# Altium PCB ver1.PcbDoc (part 1 of 2)
Units mil, origin at the board's own origin, x right, y up, seen from the top; angles counter-clockwise.
Board outline 3990 x 2445 mil, 4 copper layers (Top Layer, Top Inner, Bottom Inner, Bottom Layer), stack 53.912 mil thick; 100 components, 79 nets, 453 pads, 152 vias.
Unrouted connection lines stored in the file: 12.
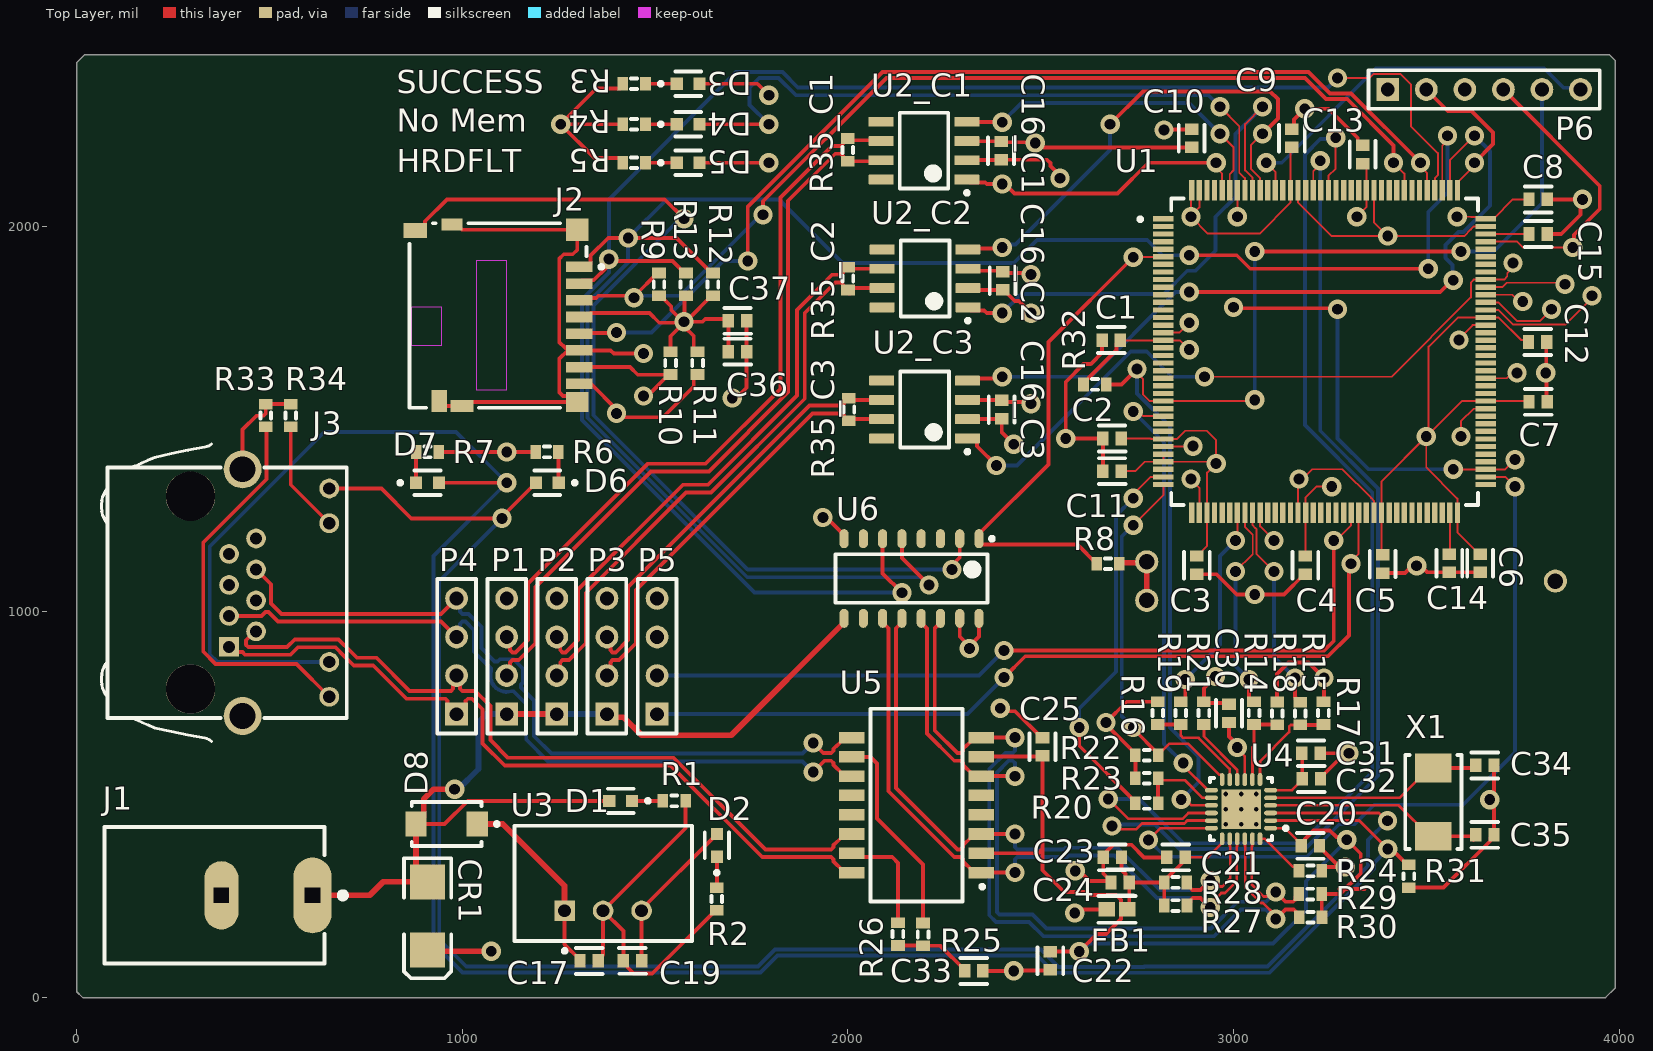
[diagram p0: Top Layer view]
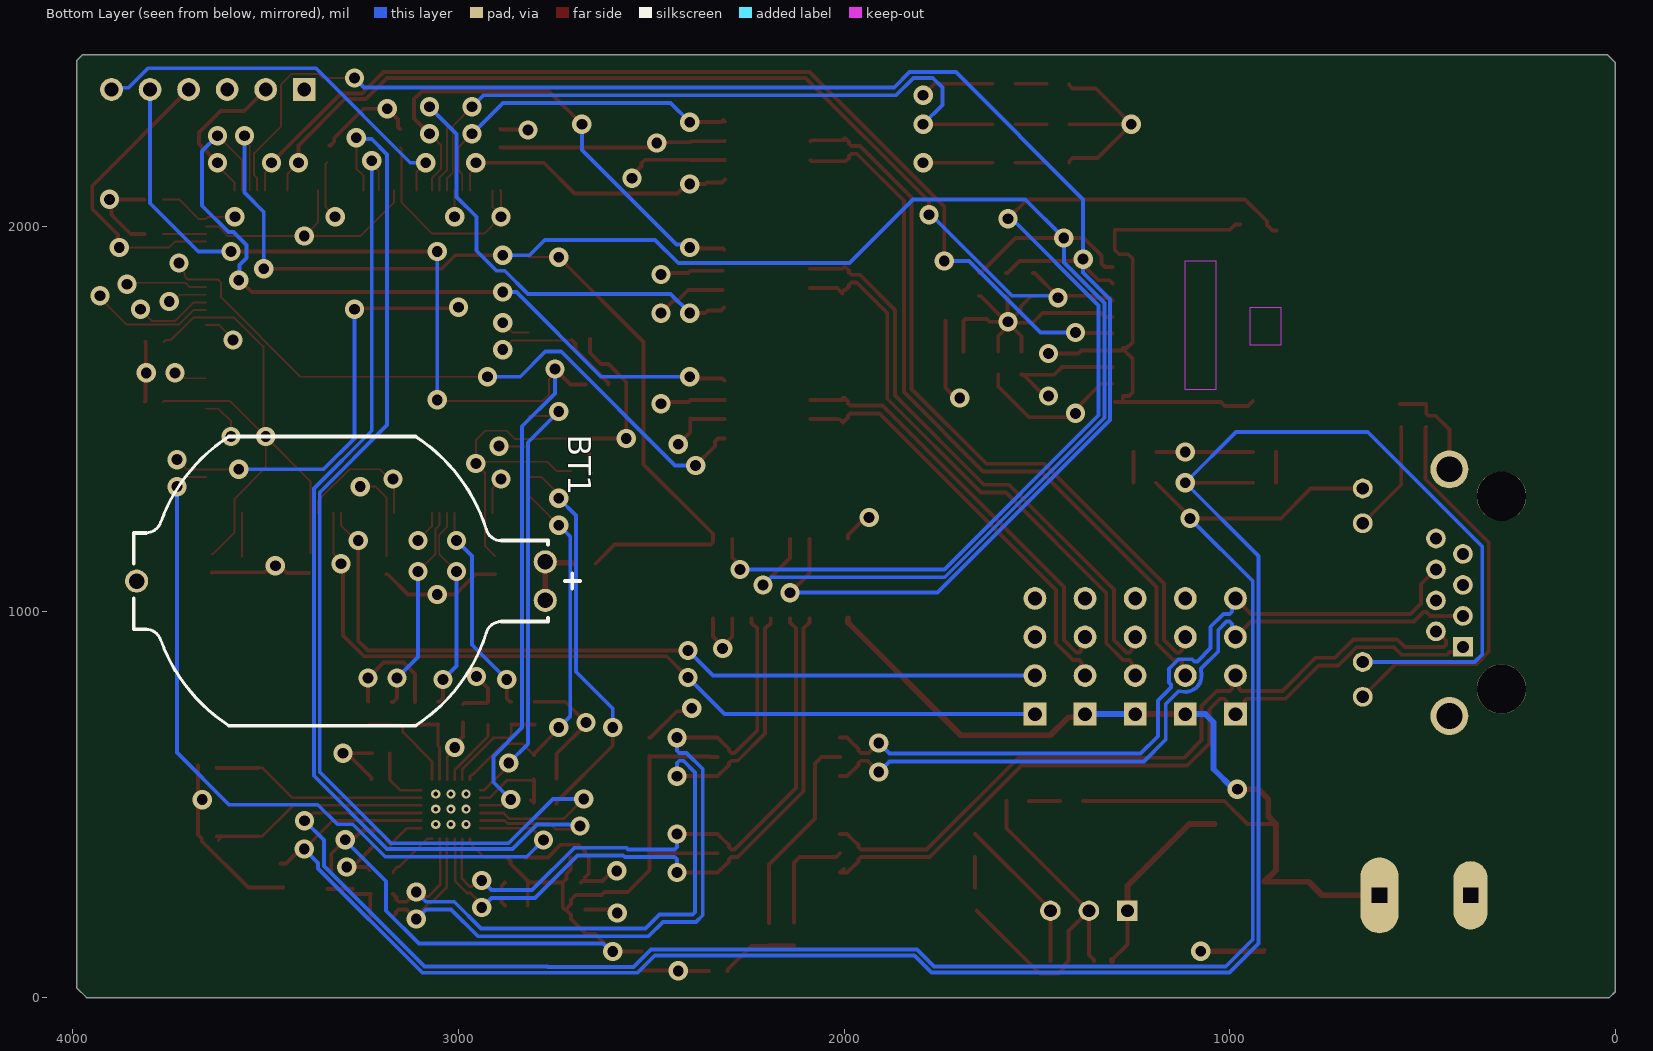
[diagram p1: Bottom Layer view, seen from below]
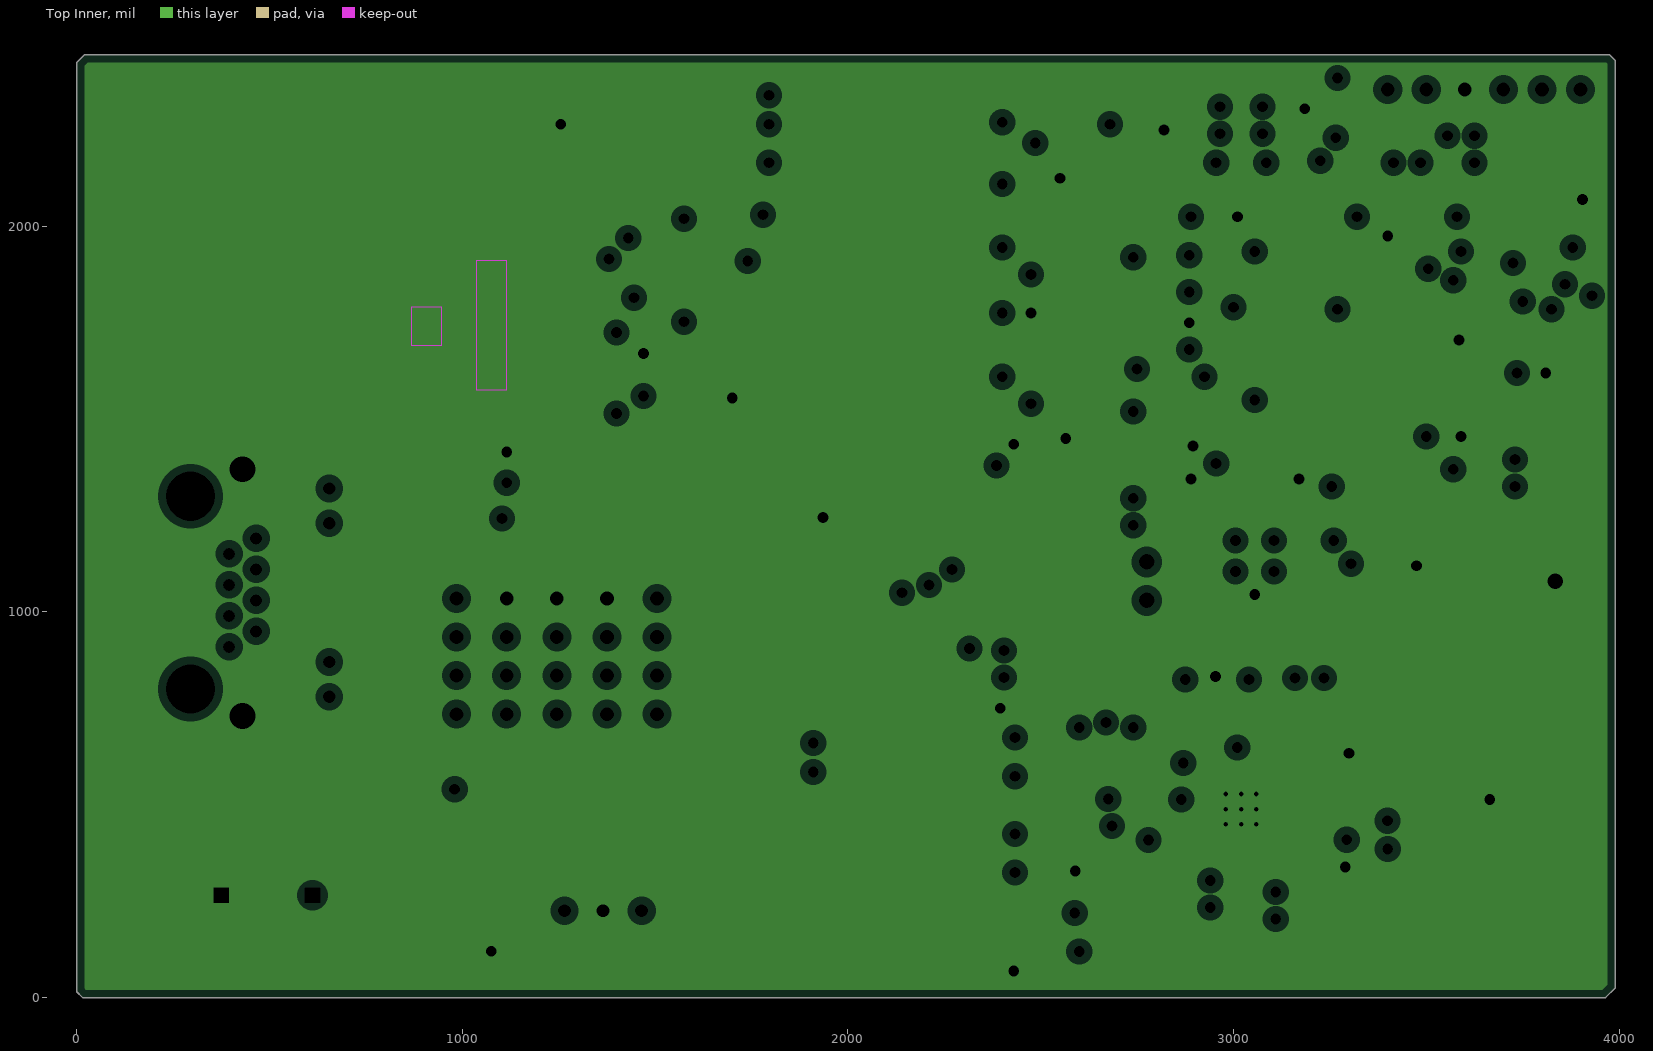
[diagram p2: Top Inner, clearances drawn from the general rule]
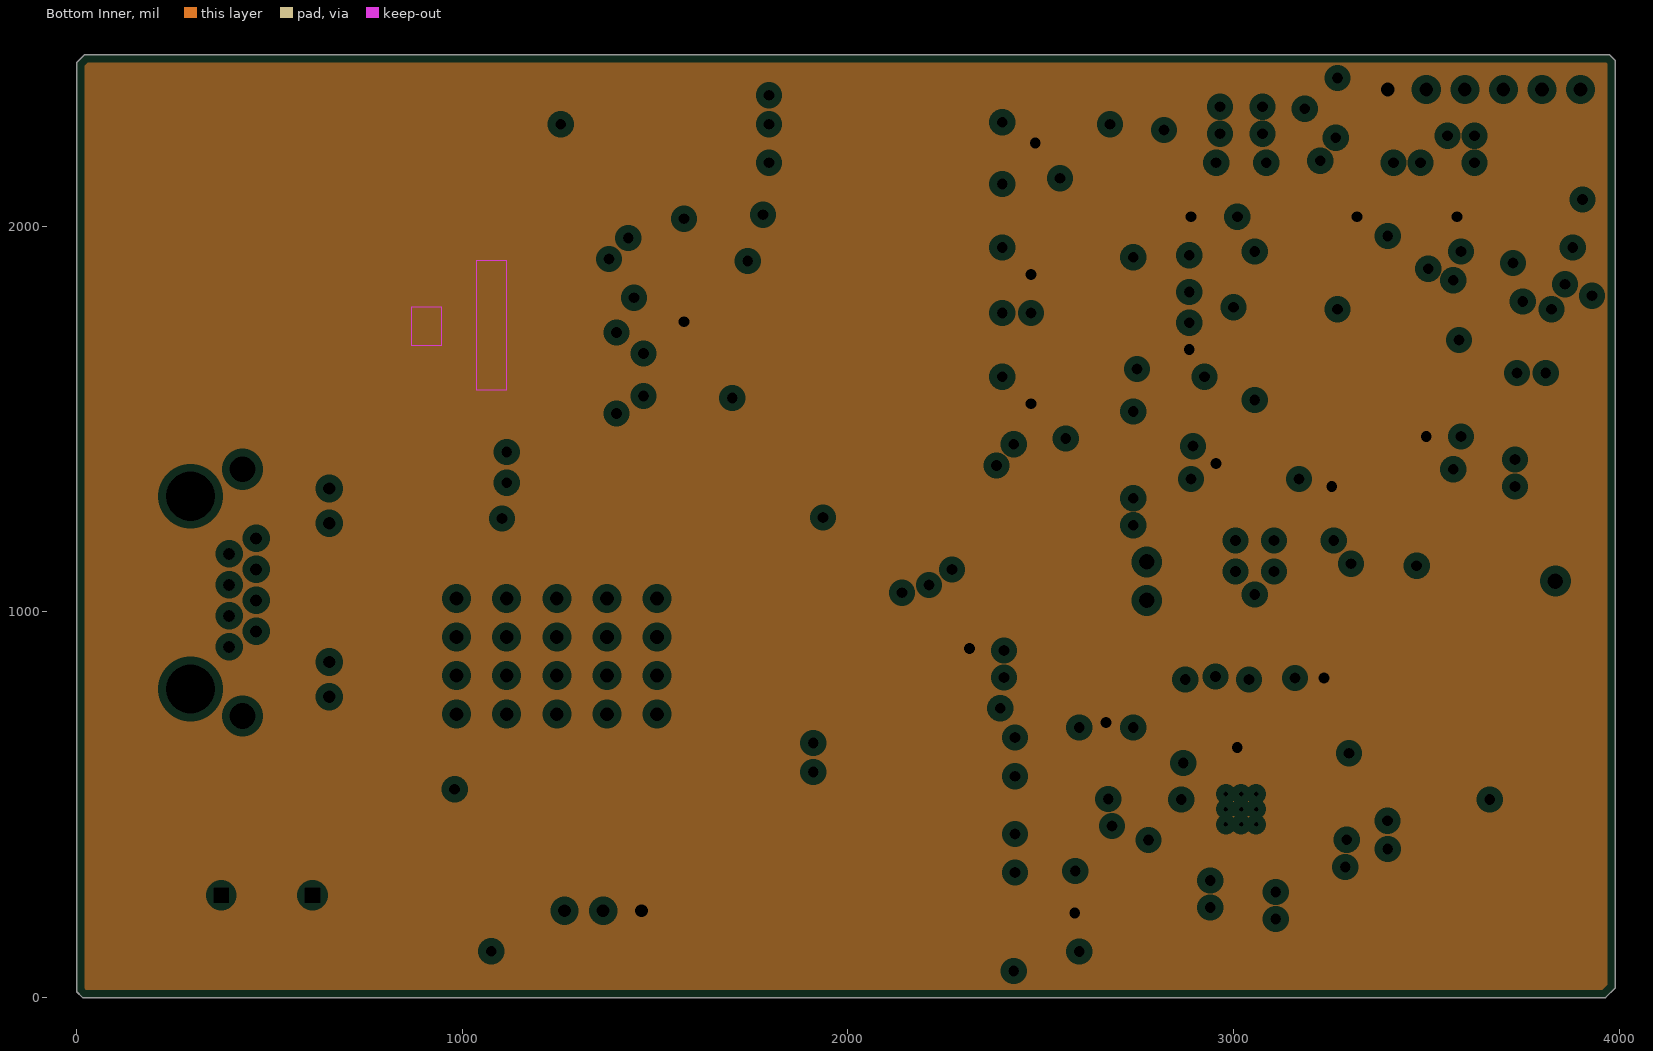
[diagram p3: Bottom Inner, clearances drawn from the general rule]
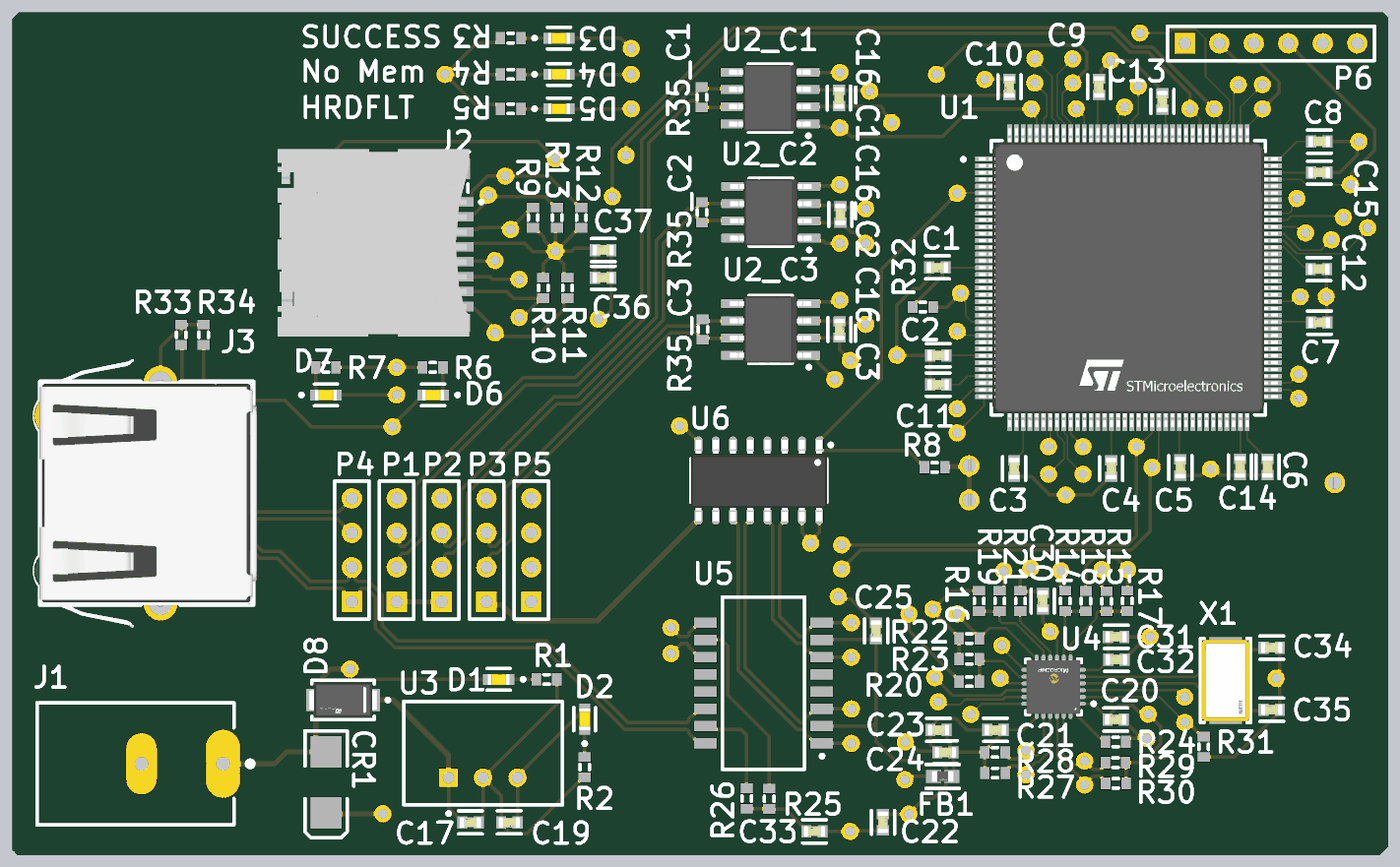
[diagram p5: 3D render of the assembled board from above, using the file's embedded part models]

## Layer stack, top to bottom
Top Solder: solder mask 1, SM-001, Dk 4
Top Layer: signal copper 1.378
Dielectric 1: prepreg 5.1, PP-017, Dk 4.3
Dielectric 2: prepreg 5.1, PP-017, Dk 4.3
Top Inner: plane copper 1.378, net GND
Dielectric 3: core 28, Core-039, Dk 4.8
Bottom Inner: plane copper 1.378, net 3.3V
Dielectric 4: prepreg 5.1, PP-017, Dk 4.3
Dielectric 5: prepreg 5.1, PP-017, Dk 4.3
Bottom Layer: signal copper 1.378
Bottom Solder: solder mask 1, SM-001, Dk 4

## Board outline
3975,2445 3990,2430 3990,25 3965,0 15,0 0,15 0,2425 20,2445

## Design rules (kind name [scope] priority, off if disabled: settings)
Clearance [All] p1: gap=10 ignorepadtopadclearanceinfootprint=FALSE except(0: SMDPad-Hole Via-Hole Fill-Hole Poly-Hole Region-Hole Text-Hole; 5: Arc-Arc Arc-Track Track-Track SMDPad-SMDPad; 7.87: Arc-THPad Track-THPad; 13: Arc-Hole Track-Hole; 19.68: THPad-THPad THPad-Hole Via-Via)
DiffPairsRouting [All] p1: maxlimit=100 minlimit=10 mostfreqgap=10 toplayer_minwidth=3.5 toplayer_maxwidth=100 toplayer_prefwidth=10 bottomlayer_minwidth=3.5 bottomlayer_maxwidth=100 bottomlayer_prefwidth=10 maxuncoupledlength=20
HoleSize [All] p1: absolutevalues=TRUE maxlimit=100 minlimit=7.88 maxpercent=80.000 minpercent=20.000
HoleToHoleClearance [All] p1: gap=20 allowstackedmicrovias=TRUE
PlaneClearance [All] p1: clearance=20
PlaneConnect [All] p1: planeconnectstyle=Relief reliefexpansion=20 reliefentries=4 reliefconductorwidth=10 reliefairgap=10
PolygonConnect [All] p1: connectstyle=Relief reliefconductorwidth=10 reliefentries=4 polygonreliefangle="90 Angle" airgapwidth=10
RoomDefinition U_MCU_POWER [InComponentClass('U_MCU_POWER')] p1: confinementstyle=ConfineIn formatcopy=TRUE lockcomponents=FALSE outline 825,-10 3890,-10 3890,1485 825,1485
RoomDefinition U_MCU [InComponentClass('U_MCU')] p2: confinementstyle=ConfineIn formatcopy=TRUE lockcomponents=FALSE outline 2530,990 3965,990 3965,2430 2530,2430
RoomDefinition U_CONNECTOR [InComponentClass('U_CONNECTOR')] p3: confinementstyle=ConfineIn formatcopy=TRUE lockcomponents=FALSE outline 35,30 1650,30 1650,1640 35,1640
RoomDefinition U_ETHERNET_INTERFACE [InComponentClass('U_ETHERNET_INTERFACE')] p4: confinementstyle=ConfineIn formatcopy=TRUE lockcomponents=FALSE outline 1944.84,-21.42 3899.84,-21.42 3899.84,883.58 1944.84,883.58
RoomDefinition C1 [InComponentClass('C1')] p5: confinementstyle=ConfineIn formatcopy=TRUE lockcomponents=FALSE outline 1892.28,1991.34 2522.28,1991.34 2522.28,2406.34 1892.28,2406.34
RoomDefinition C2 [InComponentClass('C2')] p6: confinementstyle=ConfineIn formatcopy=TRUE lockcomponents=FALSE outline 1876.34,1690 2518.78,1690 2518.78,2077.24 1876.34,2077.24
RoomDefinition C3 [InComponentClass('C3')] p7: confinementstyle=ConfineIn formatcopy=TRUE lockcomponents=FALSE outline 1890,1380 2520,1380 2520,1760 1890,1760
RoomDefinition U_LEDS [InComponentClass('U_LEDS')] p8: confinementstyle=ConfineOut formatcopy=TRUE lockcomponents=FALSE outline 30,2470 970,2470 970,3010.94 30,3010.94
RoomDefinition U_SD_INTERFACE [InComponentClass('U_SD_INTERFACE')] p9: confinementstyle=ConfineIn formatcopy=TRUE lockcomponents=FALSE outline 820,1459.53 1900,1459.53 1900,2104.53 820,2104.53
RoomDefinition U_ESD_PROTECTION [InComponentClass('U_ESD_PROTECTION')] p10: confinementstyle=ConfineIn formatcopy=TRUE lockcomponents=FALSE outline 1895,1226.65 1895,946.65 2430,946.65 2430,1226.65
RoutingVias [All] p1: holewidth=28 width=50 viastyle="Through Hole" minholewidth=28 minwidth=50 maxholewidth=28 maxwidth=50
SolderMaskExpansion [All] p1: expansion=2 istentingtop=FALSE
Width [All] p1: maxlimit=1000 minlimit=3.5 preferedwidth=10 minimp=50.000000 maximp=50.000000 favimp=50.000000
25 further rules are at their usual default settings.

## Classes and differential pairs
component class C1: C16 C16_C1 R35_C1 U2_C1
channel class CAN_TRANSCEIVER: C2 C3 U_CAN_TRANSCEIVER1
net class SD_D[3..0]: SD_D0 SD_D1 SD_D2 SD_D3
component class U_SD_INTERFACE: C36 C37 J2 R9 R10 R11 R12 R13
component class U_MCU: C1 C2 C3 C4 C5 C6 C7 C8 C9 C10 C11 C12 C13 C14 C15 P6 R32 U1
component class U_MCU_POWER: BT1 C17 C19 CR1 D8 R8 U3
component class U_LEDS: D1 D2 D3 D4 D5 D6 D7 R1 R2 R3 R4 R5 R6 R7
component class U_ETHERNET_INTERFACE: C20 C21 C22 C23 C24 C25 C30 C31 C32 C33 C34 C35 FB1 R14 R15 R16 R17 R18 R19 R20 R21 R22 R23 R24 R25 R26 R27 R28 R29 R30 R31 U4 U5 X1
component class U_ESD_PROTECTION: U6
component class U_CONNECTOR: J1 J3 P1 P2 P3 P4 P5 R33 R34
component class C3: C16_C3 R35_C3 U2_C3
component class C2: C16_C2 R35_C2 U2_C2
differential pair C2: +C2_P -C2_N
differential pair C1: +C1_P -C1_N
differential pair C3: +C3_P -C3_N
differential pair TX: +TX_P -TX_N
differential pair TX_PHYS: +TX_PHYS_P -TX_PHYS_N
differential pair RX: +RX_P -RX_N
differential pair RX_PHYS: +RX_PHYS_P -RX_PHYS_N

## Components (designator, comment, footprint, x,y, rotation, side; value= is the part's Value field where it differs from the comment)
BT1 "120591-1" TECO-120591-1-2_V 3304.92,1080 r0 bottom locked
C1 "100nF" FP-C0603C-CF-MFG 2682.76,1705 r180 top value="0.10 μF"
C2 "100nF" FP-C0603C-CF-MFG 2685,1450 r180 top value="0.10 μF"
C3 "100nF" FP-C0603C-CF-MFG 2905,1121.38 r270 top value="0.10 μF"
C4 "100nF" FP-C0603C-CF-MFG 3186.38,1121.38 r270 top value="0.10 μF"
C5 "100nF" FP-C0603C-CF-MFG 3387.01,1124.37 r270 top value="0.10 μF"
C6 "100nF" FP-C0603C-CF-MFG 3640,1126.38 r270 top value="0.10 μF"
C7 "100nF" FP-C0603C-CF-MFG 3790,1545 r0 top value="0.10 μF"
C8 "100nF" FP-C0603C-CF-MFG 3790,2070 r0 top value="0.10 μF"
C9 "100nF" FP-C0603C-CF-MFG 3151.38,2228.62 r90 top value="0.10 μF"
C10 "100nF" FP-C0603C-CF-MFG 2891.38,2228.62 r90 top value="0.10 μF"
C11 "100nF" FP-C0603C-CF-MFG 2685,1365 r180 top value="0.10 μF"
C12 "100nF" FP-C0603C-CF-MFG 3788.62,1700 r0 top value="0.10 μF"
C13 "4.7uF" FP-C0603C-CF-MFG 3335,2186.38 r90 top value="0.10 μF"
C14 "2.2uF" FP-C0603C-CF-MFG 3560,1126.38 r270 top value="0.10 μF"
C15 "2.2uF" FP-C0603C-CF-MFG 3790,1980 r0 top value="0.10 μF"
C16_C1 "100nF" FP-C0603C-CF-MFG 2397.28,2196.34 r270 top value="0.10 μF" (schematic designator C16)
C16_C2 "100nF" FP-C0603C-CF-MFG 2401.28,1858.88 r270 top value="0.10 μF" (schematic designator C16)
C16_C3 "100nF" FP-C0603C-CF-MFG 2398.78,1525 r270 top value="0.10 μF" (schematic designator C16)
C17 "2.2uF, 20V" FP-C0603C-CF-MFG 1328.62,95 r0 top value="0.10 μF"
C19 "4.7uF" FP-C0603C-CF-MFG 1441.38,95 r180 top value="0.10 μF"
C20 "100nF" FP-C0603C-CF-MFG 3199.53,393.42 r0 top value="0.10 μF"
C21 "100nF" FP-C0603C-CF-MFG 2850.91,363.42 r180 top value="0.10 μF"
C22 "100nF" FP-C0603C-CF-MFG 2524.84,95.43 r270 top value="0.10 μF"
C23 "10uF" FP-C0603C-CF-MFG 2685.91,363.42 r180 top value="0.10 μF"
C24 "100nF" FP-C0603C-CF-MFG 2705.91,298.42 r180 top value="0.10 μF"
C25 "100nF" FP-C0603C-CF-MFG 2504.84,650.43 r90 top value="0.10 μF"
C30 "100nF" FP-C0603C-CF-MFG 2988.27,736.97 r90 top value="0.10 μF"
C31 "470pF" FP-C0603C-CF-MFG 3200.91,633.42 r0 top value="0.10 μF"
C32 "1uF" FP-C0603C-CF-MFG 3201.89,566.97 r0 top value="0.10 μF"
C33 "1nF, 2kV" FP-C0603C-CF-MFG 2326.22,69.06 r0 top value="0.10 μF"
C34 "36pF" FP-C0603C-CF-MFG 3651.89,601.97 r0 top value="0.10 μF"
C35 "36pF" FP-C0603C-CF-MFG 3651.89,421.97 r0 top value="0.10 μF"
C36 "100nF" FP-C0603C-CF-MFG 1713.62,1675 r0 top value="0.10 μF"
C37 "10uF" FP-C0603C-CF-MFG 1713.62,1755 r0 top value="0.10 μF"
CR1 "SMBJ20CA" SMB 910,211.42 r270 top value=Value
D1 "ASMT-RF45-AN002" FP-ASMT-RF45-AN002-MFG 1410.47,510 r180 top
D2 "ASMT-RF45-AN002" FP-ASMT-RF45-AN002-MFG 1660,394.53 r90 top
D3 "ASMT-RF45-AN002" FP-ASMT-RF45-AN002-MFG 1585.47,2370 r0 top
D4 "ASMT-RA45-AP932" FP-ASMT-RF45-AN002-MFG 1585.47,2265 r0 top
D5 "ASMT-RH45-AQ502" FP-ASMT-RF45-AN002-MFG 1585.47,2165 r0 top
D6 "ASMT-RJ45-AQ502" FP-ASMT-RF45-AN002-MFG 1220.47,1335 r180 top
D7 "ASMT-RF45-AN002" FP-ASMT-RF45-AN002-MFG 909.53,1335 r0 top
D8 "STPS1H100A" FP-SMA-MFG 959.33,450 r180 top
FB1 "BLM18PG181SN1D" FP-BLM18-0_15-t0_8-IPC_B 2697.91,228.42 r0 top
J1 "PJ-037A" CUI_PJ-037A 611.22,265 r180 top
J2 "DM3D-SF" FP-DM3D-SF-MFG 1092.44,1768.82 r90 top
J3 "Modular Jack WR-MJ" 615008137421 390.08,1050 r270 top
P1 "CAN1" HDR1X4 1115,735 r90 top
P2 "CAN2" HDR1X4 1245,735 r90 top
P3 "CAN3" HDR1X4 1375,735 r90 top
P4 "Ethernet Output" HDR1X4 985,735 r90 top
P5 "UART and GPIO" HDR1X4 1505,735 r90 top
P6 "Nucleo Connector" HDR1X6 3400,2355 r0 top
R1 "Res3" J1-0603 1549.53,510 r180 top value=1K
R2 "Res3" J1-0603 1660,255.47 r90 top value=130
R3 "Res3" J1-0603 1445.47,2370 r0 top value=130
R4 "Res3" J1-0603 1445.47,2265 r0 top value=130
R5 "Res3" J1-0603 1445.47,2165 r0 top value=130
R6 "Res3" J1-0603 1219.53,1415 r0 top value=270
R7 "Res3" J1-0603 909.53,1415 r180 top value=270
R8 "Res3" J1-0603 2674.53,1125 r0 top value=10
R9 "Res3" J1-0603 1510,1849.53 r270 top value=47K
R10 "Res3" J1-0603 1540,1645.47 r90 top value=47K
R11 "Res3" J1-0603 1610,1645.47 r90 top value=47K
R12 "Res3" J1-0603 1650,1849.53 r270 top value=47K
R13 "Res3" J1-0603 1580,1849.53 r270 top value=47K
R14 "Res3" J1-0603 3053.27,737.44 r90 top value=33
R15 "Res3" J1-0603 3173.27,736.49 r90 top value=33
R16 "Res3" J1-0603 2803.27,737.44 r270 top value=10K
R17 "Res3" J1-0603 3233.27,737.44 r270 top value=10K
R18 "Res3" J1-0603 3113.27,736.97 r270 top value=10K
R19 "Res3" J1-0603 2863.27,737.44 r90 top value=33
R20 "Res3" J1-0603 2775,503.42 r0 top value=33
R21 "Res3" J1-0603 2923.27,737.44 r90 top value=10K
R22 "Res3" J1-0603 2775,628.42 r0 top value=1K5
R23 "Res3" J1-0603 2775,568.42 r0 top value=10K
R24 "Res3" J1-0603 3199.53,328.42 r0 top value=12K1
R25 "Res3" J1-0603 2194.84,163.58 r270 top value=75
R26 "Res3" J1-0603 2129.84,164.53 r270 top value=75
R27 "Res3" J1-0603 2850,238.42 r0 top value=50
R28 "Res3" J1-0603 2849.53,298.42 r0 top value=50
R29 "Res3" J1-0603 3199.06,268.42 r180 top value=50
R30 "Res3" J1-0603 3200,208.42 r180 top value=50
R31 "Res3" J1-0603 3454.84,314.53 r270 top value=10K
R32 "Res3" J1-0603 2640.47,1590 r0 top value=10K
R33 "Res3" J1-0603 490,1509.53 r270 top value=270
R34 "Res3" J1-0603 555,1509.53 r270 top value=270
R35_C1 "" J1-0603 1999.78,2198.37 r270 top value=120 (schematic designator R35)
R35_C2 "" J1-0603 2000,1864.53 r270 top value=120 (schematic designator R35)
R35_C3 "" J1-0603 2002.56,1525 r270 top value=120 (schematic designator R35)
U1 "STM32F767ZIT6" FP-LQFP144-1A-MFG 3236.38,1675 r0 top locked
U2_C1 "SN65HVD232QDG4" D0008A_M 2197.28,2196.34 r180 top (schematic designator U2)
U2_C2 "SN65HVD232QDG4" D0008A_M 2200,1865 r180 top (schematic designator U2)
U2_C3 "SN65HVD232QDG4" D0008A_M 2198.78,1525 r180 top (schematic designator U2)
U3 "TSR 1-2433" TRACO-SIP-3_V 1365,225 r0 top
U4 "LAN8742A-CZ-TR" FP-C04-143B-S4QFN-MFG 3019.53,488.42 r180 top
U5 "H1102NL" PULS-MODULE-16_V 2178.27,499.06 r180 top
U6 "SP720ABG" LFUS-SOIC-16_L 2165,1086.65 r270 top
X1 "ECS-250-18-23A-JGN-TR" FP-ECX-64A-MFG 3518.27,506.97 r270 top

## Footprints (in the part's own frame and the unit in brackets; to place one, negate y for a bottom-side part, rotate by r counter-clockwise, add the part's x,y. Pads: shape width x height; smd on the part's side, far side on the other; paste and mask are expansions set on the pad)
615008137421 [mm] "Modular Jack Horizontal Shielded with LED and EMI Panel Finger 8P8C Tab Up"
  rect 1.3x1.3 hole 0.8: 1(3.57,0.125)
  round 1.3 hole 0.8: 2(2.55,1.905) 3(1.53,0.125) 4(0.51,1.905) 5(-0.51,0.125) 6(-1.53,1.905) 7(-2.55,0.125) 8(-3.57,1.905) 9(-6.86,6.725) 10(-4.57,6.725) 11(4.57,6.725) 12(6.86,6.725)
  round 3.25 hole 3.25 unplated: MH1(-6.35,-2.415) MH2(6.35,-2.415)
  round 2.5 hole 1.7: S1(-8.125,1.015) S2(8.125,1.015)
  silkscreen extent -9.79,-8.29 9.79,7.87, body extent -9.88,-8.33 9.88,8.12, height 15.13
CUI_PJ-037A [mm]
  oval 2.5x5 hole 1 square: 1(0,0)
  oval 2.25x4.5 hole 1 square: 2(6,0)
  silkscreen extent -2.2,-4.5 13.7,4.5
D0008A_M [mm] "SOIC, 8-Leads, Body 5x4mm, Pitch 1.27mm, IPC Low Density"
  rrect15% 1.65x0.65 smd: 1(-2.825,1.905) 2(-2.825,0.635) 3(-2.825,-0.635) 4(-2.825,-1.905) 5(2.825,-1.905) 6(2.825,-0.635) 7(2.825,0.635) 8(2.825,1.905)
  silkscreen extent -2.95,-2.5 1.6,2.9, body extent -3,-2.45 3,2.45, height 1.63
FP-ASMT-RF45-AN002-MFG [mm]
  rect 0.8x0.8 smd paste+0 mask+0: 1(-0.75,0) 2(0.75,0)
  silkscreen extent -1.92,-0.8 0.85,0.8, body extent -1.25,-0.55 1.25,0.55, height 0.25
FP-BLM18-0_15-t0_8-IPC_B [mil]
  rect 43.55x37.73 smd paste+0 mask+0: 1(-26.62,0) 2(26.62,0)
  silkscreen extent -48,-35 48,35, body extent -58,-29 58,29, height 10
FP-C04-143B-S4QFN-MFG [mm]
  rrect100% 0.85x0.3 smd paste+0 mask+0: 1(-1.95,1.25) 2(-1.95,0.75) 3(-1.95,0.25) 4(-1.95,-0.25) 5(-1.95,-0.75) 6(-1.95,-1.25) 13(1.95,-1.25) 14(1.95,-0.75) 15(1.95,-0.25) 16(1.95,0.25) 17(1.95,0.75) 18(1.95,1.25)
  rrect100% 0.3x0.85 smd paste+0 mask+0: 7(-1.25,-1.95) 8(-0.75,-1.95) 9(-0.25,-1.95) 10(0.25,-1.95) 11(0.75,-1.95) 12(1.25,-1.95) 19(1.25,1.95) 20(0.75,1.95) 21(0.25,1.95) 22(-0.25,1.95) 23(-0.75,1.95) 24(-1.25,1.95)
  rect 2.6x2.6 smd paste+0 mask+0: 25(0,0)
  silkscreen extent -3.08,-2.05 2.05,2.05, body extent -2.47,-2.47 2.47,2.47, height 0.25
FP-C0603C-CF-MFG [mm]
  rect 0.75x0.9 smd paste+0 mask+0: 1(-0.6,0) 2(0.6,0)
  silkscreen extent -0.87,-0.85 0.88,0.85, body extent -1.2,-0.6 1.2,0.6, height 0.25
FP-DM3D-SF-MFG [mm]
  rect 0.7x1.75 smd paste+0 mask+0: 1(3.2,-5.35) 2(2.1,-5.35) 3(1,-5.35) 4(-0.1,-5.35) 5(-1.2,-5.35) 6(-2.3,-5.35) 7(-3.4,-5.35) 8(-4.5,-5.35)
  rect 1x1.55 smd paste+0 mask+0: 9(5.6,5.45)
  rect 1.45x1 smd paste+0 mask+0: 10(-5.625,3.875)
  rect 0.8x1.4 smd paste+0 mask+0: 11(6,3.025)
  rect 0.8x1.5 smd paste+0 mask+0: 12(-5.95,2.375)
  rect 1.3x1.5 smd paste+0 mask+0: 13(-5.7,-5.225)
  rect 1.5x1.5 smd paste+0 mask+0: 14(5.65,-5.225)
  Keep-Out Layer region: -1.95,3.72 0.55,3.72 0.55,5.72 -1.95,5.72
  Keep-Out Layer region: -4.9,-0.575 3.6,-0.575 3.6,1.425 -4.9,1.425
  silkscreen extent -6.07,-6.93 6.07,5.82, body extent -6.45,-6.32 6.5,6.32, height 0.25
FP-ECX-64A-MFG [mm]
  rect 1.9x2.4 smd paste+0 mask+0: 1(-2.25,0) 2(2.25,0)
  silkscreen extent -3.1,-1.85 3.1,1.85, body extent -3.3,-1.95 3.3,1.95, height 0.25
FP-LQFP144-1A-MFG [mm]
  rect 1.35x0.35 smd paste+0 mask+0: 1(-10.625,8.75) 2(-10.625,8.25) 3(-10.625,7.75) 4(-10.625,7.25) 5(-10.625,6.75) 6(-10.625,6.25) 7(-10.625,5.75) 8(-10.625,5.25) 9(-10.625,4.75) 10(-10.625,4.25) 11(-10.625,3.75) 12(-10.625,3.25) 13(-10.625,2.75) 14(-10.625,2.25) 15(-10.625,1.75) 16(-10.625,1.25) 17(-10.625,0.75) 18(-10.625,0.25) 19(-10.625,-0.25) 20(-10.625,-0.75) 21(-10.625,-1.25) 22(-10.625,-1.75) 23(-10.625,-2.25) 24(-10.625,-2.75) 25(-10.625,-3.25) 26(-10.625,-3.75) 27(-10.625,-4.25) 28(-10.625,-4.75) 29(-10.625,-5.25) 30(-10.625,-5.75) 31(-10.625,-6.25) 32(-10.625,-6.75) 33(-10.625,-7.25) 34(-10.625,-7.75) 35(-10.625,-8.25) 36(-10.625,-8.75) 73(10.625,-8.75) 74(10.625,-8.25) 75(10.625,-7.75) 76(10.625,-7.25) 77(10.625,-6.75) 78(10.625,-6.25) 79(10.625,-5.75) 80(10.625,-5.25) 81(10.625,-4.75) 82(10.625,-4.25) 83(10.625,-3.75) 84(10.625,-3.25) 85(10.625,-2.75) 86(10.625,-2.25) 87(10.625,-1.75) 88(10.625,-1.25) 89(10.625,-0.75) 90(10.625,-0.25) 91(10.625,0.25) 92(10.625,0.75) 93(10.625,1.25) 94(10.625,1.75) 95(10.625,2.25) 96(10.625,2.75) 97(10.625,3.25) 98(10.625,3.75) 99(10.625,4.25) 100(10.625,4.75) 101(10.625,5.25) 102(10.625,5.75) 103(10.625,6.25) 104(10.625,6.75) 105(10.625,7.25) 106(10.625,7.75) 107(10.625,8.25) 108(10.625,8.75)
  rect 0.35x1.35 smd paste+0 mask+0: 37(-8.75,-10.625) 38(-8.25,-10.625) 39(-7.75,-10.625) 40(-7.25,-10.625) 41(-6.75,-10.625) 42(-6.25,-10.625) 43(-5.75,-10.625) 44(-5.25,-10.625) 45(-4.75,-10.625) 46(-4.25,-10.625) 47(-3.75,-10.625) 48(-3.25,-10.625) 49(-2.75,-10.625) 50(-2.25,-10.625) 51(-1.75,-10.625) 52(-1.25,-10.625) 53(-0.75,-10.625) 54(-0.25,-10.625) 55(0.25,-10.625) 56(0.75,-10.625) 57(1.25,-10.625) 58(1.75,-10.625) 59(2.25,-10.625) 60(2.75,-10.625) 61(3.25,-10.625) 62(3.75,-10.625) 63(4.25,-10.625) 64(4.75,-10.625) 65(5.25,-10.625) 66(5.75,-10.625) 67(6.25,-10.625) 68(6.75,-10.625) 69(7.25,-10.625) 70(7.75,-10.625) 71(8.25,-10.625) 72(8.75,-10.625) 109(8.75,10.625) 110(8.25,10.625) 111(7.75,10.625) 112(7.25,10.625) 113(6.75,10.625) 114(6.25,10.625) 115(5.75,10.625) 116(5.25,10.625) 117(4.75,10.625) 118(4.25,10.625) 119(3.75,10.625) 120(3.25,10.625) 121(2.75,10.625) 122(2.25,10.625) 123(1.75,10.625) 124(1.25,10.625) 125(0.75,10.625) 126(0.25,10.625) 127(-0.25,10.625) 128(-0.75,10.625) 129(-1.25,10.625) 130(-1.75,10.625) 131(-2.25,10.625) 132(-2.75,10.625) 133(-3.25,10.625) 134(-3.75,10.625) 135(-4.25,10.625) 136(-4.75,10.625) 137(-5.25,10.625) 138(-5.75,10.625) 139(-6.25,10.625) 140(-6.75,10.625) 141(-7.25,10.625) 142(-7.75,10.625) 143(-8.25,10.625) 144(-8.75,10.625)
  silkscreen extent -12.27,-10.1 10.1,10.1, body extent -11.4,-11.4 11.4,11.4, height 0.25
FP-SMA-MFG [mm]
  rect 1.4x1.64 smd paste+0 mask+0: 1(-2.015,0) 2(2.015,0)
  silkscreen extent -3.43,-1.45 2.3,1.45, body extent -2.82,-1.55 2.82,1.55, height 0.25
HDR1X4 [mm] "Connector; Header; 4 Position"
  rect 1.5x1.5 hole 0.9: 1(0,0)
  round 1.5 hole 0.9: 2(2.54,0) 3(5.08,0) 4(7.62,0)
  silkscreen extent -1.27,-1.27 8.89,1.27
HDR1X6 [mm] "Connector; Header; 6 Position"
  rect 1.5x1.5 hole 0.9: 1(0,0)
  round 1.5 hole 0.9: 2(2.54,0) 3(5.08,0) 4(7.62,0) 5(10.16,0) 6(12.7,0)
  silkscreen extent -1.27,-1.27 13.97,1.27
J1-0603 [mm] "Chip Resistor, Body 1.6x0.8mm, IPC High Density"
  rect 0.7x0.9 smd: 1(-0.75,0) 2(0.75,0)
  silkscreen extent -0.2,-0.35 0.2,0.35, body extent -0.85,-0.48 0.85,0.48, height 0.9
LFUS-SOIC-16_L [mm] "SOIC, 16-Leads, Body 10x4mm, Pitch 1.27mm, IPC High Density"
  oval 1.25x0.6 smd: 1(-2.625,4.445) 2(-2.625,3.175) 3(-2.625,1.905) 4(-2.625,0.635) 5(-2.625,-0.635) 6(-2.625,-1.905) 7(-2.625,-3.175) 8(-2.625,-4.445) 9(2.625,-4.445) 10(2.625,-3.175) 11(2.625,-1.905) 12(2.625,-0.635) 13(2.625,0.635) 14(2.625,1.905) 15(2.625,3.175) 16(2.625,4.445)
  silkscreen extent -2.75,-5 1.6,5.42, body extent -3,-5 3,5, height 1.75
PULS-MODULE-16_V [mm] "SOIC, 16-Leads, Body 12.7x7.11mm, Pitch 1.27mm"
  rect 1.67x0.76 smd paste+0: 1(-4.265,4.445) 2(-4.265,3.175) 3(-4.265,1.905) 4(-4.265,0.635) 5(-4.265,-0.635) 6(-4.265,-1.905) 7(-4.265,-3.175) 8(-4.265,-4.445) 9(4.265,-4.445) 10(4.265,-3.175) 11(4.265,-1.905) 12(4.265,-0.635) 13(4.265,0.635) 14(4.265,1.905) 15(4.265,3.175) 16(4.265,4.445)
  silkscreen extent -4.44,-6.35 3.03,6.35, body extent -3.55,-6.35 3.55,6.35, height 5.97
SMB [mm] "DO-214-AA/SMB; 2 C-Bend Leads; Body 5.3 x 3.6 mm, inc. leads (LxW)"
  rect 2.3x2.3 smd: 1(-2.25,0) 2(2.25,0)
  silkscreen extent -3.8,-1.55 4.1,1.55
TECO-120591-1-2_V [mm] "Lithium Battery Holder"
  round 1.52 hole 1.02: 1(-13.46,-1.27) 1(-13.46,1.27) 2(13.46,0)
  silkscreen extent -15.74,-9.53 13.65,9.53, body extent -13.65,-9.53 13.66,9.52, height 6.41
TRACO-SIP-3_V [mm] "SIP, 3-Leads, Body 11.7x7.6mm, Pitch 2.54mm"
  rect 1.35x1.35 hole 0.85 paste+0: 1(-2.54,0)
  round 1.35 hole 0.85 paste+0: 2(0,0) 3(2.54,0)
  silkscreen extent -5.84,-2.77 5.86,5.6, body extent -5.84,-2 5.86,5.6, height 10.2

## Part data
BT1: library part CMP-0438-00001-2, "Lithium Battery Holder for CR2032 3V Cell", Manufacturer="TE Connectivity", AccessRights=2147483647, Body Shape="Horizontal Cylindrical", ComponentLink1Description="Manufacturer URL", ComponentLink1URL=http://www.te.com/, ComponentLink2Description=Datasheet, ComponentLink2URL=http://www.te.com/commerce/DocumentDelivery/DDEController?Action=showdoc&DocId=Customer+Drawing%7F120591%7FH%7Fpdf%7FEnglish%7FENG_CD_120591_H.pdf%7F120591-1, ContentType="Unified Component", ContentTypeGUID=CB3C11C4-E317-11DF-B822-12313F0024A2, DatasheetVersion="Rev. H, 01/2013", Folder="Unified Components\Components\TE Connectivity\Connectors & Connector Components\Power Products\Battery Interconnection Products\", FolderGUID=A6761B51-D489-48A3-9180-F4808F45AB79, ItemGUID=B2C50140-681E-4F62-8DBB-9728605318CE, ItemHRID=CMP-0438-00001, LifeCycle=Released, LifeCycleStateGUID=61E382EE-6656-4F12-9E24-BE9327104A25, Mounting Technology="Through Hole", PackageDescription="Lithium Battery Holder", PackageReference=120591-1, Packing Type=Tray, PartNumber=120591-1, ReleaseDate="20/08/2013 02:50:22 AM", RevisionId=1
C1 C2 C3 C4 C5 C6 C7 C8 C9 C10 C11 C12 C13 C14 C15 C16_C1 C16_C2 C16_C3 C17 C19 C20 C21 C22 C23 C24 C25 C30 C31 C32 C33 C34 C35 C36 C37: library part CMP-2006-03061-2, "Any 0603 Cap is fine here", Capacitance="0.10 μF", Manufacturer=KEMET, Manufacturer Part Number=C0603C104K5RACTU, Package=C0603C-CF, Temperature="-55°C to +125°C", Temperature Characteristic=X7R, Temperature Coefficient=30ppm/°C, Temperature Range High=+125°C, Temperature Range Low=-55°C, Tolerance=0.1, Voltage Rating="50 V", Automotive=Yes, Automotive Grade="Grade 1", Category=Cap, ComponentLink2Description=Datasheet, ComponentLink2URL=https://api.kemet.com/component-edge/download/datasheet/C0603C100J5GACAUTO.pdf, Device Class L1="Passive Components", Device Class L2=Capacitors, Device Class L3="Ceramic Capacitors", Digikey Description="CAP CER 0.1UF 50V X7R 0603", Height=0.87mm, Lead Free=Yes, Material=Ceramic, Octopart=https://octopart.com/c0603c104k5ractu-kemet-139244, RoHS=TRUE
CR1: "Imported", Built_By=EMA_UL_Team, C="Copyright (C) 2015 Accelerated Designs. All rights reserved", Manufacturer_Part_Number=SMBJ20CA, Part Number=SMBJ20CA, RefDes=RefDes, Type=DEV, Vendor="Bourns Electronics"
D1 D2 D3 D7: library part CMP-2000-05796-2, "LED YLW/GREEN DIFFUSED 0603 SMD", Colour="Yellow Green", Forward Current=20mA, Forward Voltage=2V, Manufacturer=Broadcom, Max Junction Temp=+110°C, Power Dissipation=48mW, Reverse Voltage=5V, Temperature="-40°C to +100°C", Temperature Range High=+100°C, Temperature Range Low=-40°C, Automotive=No, Category=Diode, ComponentLink2Description=Datasheet, ComponentLink2URL=https://docs.broadcom.com/docs/AV02-0378EN, Device Class L1=Optoelectronics, Device Class L2=LEDs, Device Class L3=unset, Digikey Description="LED YLW/GREEN DIFFUSED 0603 SMD", Height=0.55mm, Lead Free=Yes, Led Orientation="Top View", Luminous Intensity=60mcd, Manufacturer Part Number=ASMT-RF45-AN002, Mouser Description="LED; SMD; 0603; yellow green; 28-60mcd; 1.6x0.8x0.45mm; 145°; 20mA", Octopart=https://octopart.com/asmt-rf45-an002-broadcom-71127304, Package=ASMT-RF45-AN002, Peak Emmision Wavelength=574nm, RoHS=TRUE, Viewing Angle=145°, Wavelength=573nm
D4: library part CMP-2000-05796-2, "LED AMBER DIFFUSED SMD", Colour="Yellow Green", Forward Current=20mA, Forward Voltage=2V, Manufacturer=Broadcom, Manufacturer Part Number=ASMT-RF45-AN002, Max Junction Temp=+110°C, Power Dissipation=48mW, Reverse Voltage=5V, Temperature="-40°C to +100°C", Temperature Range High=+100°C, Temperature Range Low=-40°C, Automotive=No, Category=Diode, ComponentLink2Description=Datasheet, ComponentLink2URL=https://docs.broadcom.com/docs/AV02-0378EN, Device Class L1=Optoelectronics, Device Class L2=LEDs, Device Class L3=unset, Digikey Description="LED YLW/GREEN DIFFUSED 0603 SMD", Height=0.55mm, Lead Free=Yes, Led Orientation="Top View", Luminous Intensity=60mcd, Mouser Description="LED; SMD; 0603; yellow green; 28-60mcd; 1.6x0.8x0.45mm; 145°; 20mA", Octopart=https://octopart.com/asmt-rf45-an002-broadcom-71127304, Package=ASMT-RF45-AN002, Peak Emmision Wavelength=574nm, RoHS=TRUE, Viewing Angle=145°, Wavelength=573nm
D5: library part CMP-2000-05796-2, "LED RED DIFFUSED 0603 SMD", Colour="Yellow Green", Forward Current=20mA, Forward Voltage=2V, Manufacturer=Broadcom, Manufacturer Part Number=ASMT-RF45-AN002, Max Junction Temp=+110°C, Power Dissipation=48mW, Reverse Voltage=5V, Temperature="-40°C to +100°C", Temperature Range High=+100°C, Temperature Range Low=-40°C, Automotive=No, Category=Diode, ComponentLink2Description=Datasheet, ComponentLink2URL=https://docs.broadcom.com/docs/AV02-0378EN, Device Class L1=Optoelectronics, Device Class L2=LEDs, Device Class L3=unset, Digikey Description="LED YLW/GREEN DIFFUSED 0603 SMD", Height=0.55mm, Lead Free=Yes, Led Orientation="Top View", Luminous Intensity=60mcd, Mouser Description="LED; SMD; 0603; yellow green; 28-60mcd; 1.6x0.8x0.45mm; 145°; 20mA", Octopart=https://octopart.com/asmt-rf45-an002-broadcom-71127304, Package=ASMT-RF45-AN002, Peak Emmision Wavelength=574nm, RoHS=TRUE, Viewing Angle=145°, Wavelength=573nm
D6: library part CMP-2000-05796-2, "LED ORANGE DIFFUSED 0603 SMD", Colour="Yellow Green", Forward Current=20mA, Forward Voltage=2V, Manufacturer=Broadcom, Manufacturer Part Number=ASMT-RF45-AN002, Max Junction Temp=+110°C, Power Dissipation=48mW, Reverse Voltage=5V, Temperature="-40°C to +100°C", Temperature Range High=+100°C, Temperature Range Low=-40°C, Automotive=No, Category=Diode, ComponentLink2Description=Datasheet, ComponentLink2URL=https://docs.broadcom.com/docs/AV02-0378EN, Device Class L1=Optoelectronics, Device Class L2=LEDs, Device Class L3=unset, Digikey Description="LED YLW/GREEN DIFFUSED 0603 SMD", Height=0.55mm, Lead Free=Yes, Led Orientation="Top View", Luminous Intensity=60mcd, Mouser Description="LED; SMD; 0603; yellow green; 28-60mcd; 1.6x0.8x0.45mm; 145°; 20mA", Octopart=https://octopart.com/asmt-rf45-an002-broadcom-71127304, Package=ASMT-RF45-AN002, Peak Emmision Wavelength=574nm, RoHS=TRUE, Viewing Angle=145°, Wavelength=573nm
D8: library part CMP-2000-07173-2, "DIODE SCHOTTKY 100V 1A SMA", Forward Current=1A, Manufacturer=STMicroelectronics, Max Junction Temp=+175°C, Max Repetitive Reverse Voltage=100V, Max Surge Forward Current=50A, Package=SMA, Peak Reverse Current=4uA, Temperature="to +175°C", Automotive=No, Category=Diode, ComponentLink2Description=Datasheet, ComponentLink2URL=https://www.st.com/resource/en/datasheet/stps1h100.pdf, Device Class L1="Discrete Semiconductors", Device Class L2=Diodes, Device Class L3="Schottky Diodes", Digikey Description="DIODE SCHOTTKY 100V 1A SMA", Height=2.65mm, Lead Free=Yes, Manufacturer Part Number=STPS1H100A, Mouser Description="Schottky Diodes & Rectifiers 1.0 Amp 100 Volt", Octopart=https://octopart.com/stps1h100a-stmicroelectronics-55399361, RoHS=TRUE, Standoff Height=0.05mm, Temperature Range High=+175°C
FB1: library part CMP-0686-00566-4, "Chip Ferrite Bead, 0603, 180Ω @ 100MHz, 0.09Ω, 25%, 1.5A", Case Code (Imperial)=0603, Case Code (Metric)=1608, Current Rating=1.5A, DC Resistance (DCR)=90mR, Max Operating Temperature=125°C, Min Operating Temperature=-55°C, Package Quantity=1, Test Frequency=100MHz, Tolerance=25%, Case/Package=0603, Core Material=Ferrite, DC Current=1.5A, Depth=0.8mm, Height=0.8mm, Impedance=180R, Lead Free="Lead Free", Length=1.6mm, Material=Ferrite, Max Current Rating=1.5A, Max DC Current=1.5A, Number of Circuits=1, Number of Lines=1, Number of Pins=2, Packaging="Tape and Reel", Radiation Hardening=No, REACH SVHC="No SVHC", Shielding=Unshielded, Termination=SMD/SMT, Width=0.8mm
J1: "2.0 x 6.5 mm, 2.5 A, Horizontal, Through Hole, Dc Power Jack Connector / VEL12US120-US-JA is a good power source", Package=None, Availability=Unavailable, CUI_purchase_URL=https://www.cuidevices.com/product/interconnect/connectors/dc-power-connectors/jacks/pj-037a?utm_source=snapeda.com&utm_medium=referral&utm_campaign=snapedaBOM, MF="CUI Devices", MP=PJ-037A, Price=None, SnapEDA_Link=https://www.snapeda.com/parts/PJ-037A/CUI%20Devices/view-part/493699/?ref=snap
J2: library part CMP-2000-06166-2, "CONN MICRO SD CARD PUSH-PULL", Contact Resistance=100mR, Current Rating=500mA, Flammability Rating="UL94 V-0", Insulation Resistance=1GR, Max Operating Temperature=85°C, Max Voltage Rating (AC)=125V, Min Operating Temperature=-25°C, Package Quantity=1, Connector Type=Connector, Contact Material="Copper Alloy", Contact Plating=Gold, Depth=11.45mm, Gender=Female, Housing Material=Polymer, Lead Free="Lead Free", Length=11.95mm, Max Current Rating=500mA, Mount="Surface Mount", Number of Contacts=8, Number of Rows=1, Orientation="Right Angle", Packaging="Tape and Reel", Pitch=1.1mm, Radiation Hardening=No, REACH SVHC="No SVHC", Termination=Solder, Voltage Rating (AC)=125V, Width=11.95mm
J3: library part CMP-1502-01697-1, "Modular Jack WR-MJ, Tab Up, Shielded, with LED and EMI Panel Finger, Horizontal Entry, THT, 8P8C", Contact Resistance=20mOhm, Manufacturer="Wurth Elektronik", Operating Temperature=-40to85degC, Package Reference=615008137421, Rated Current=1.5A, Withstanding Voltage=1000VAC, Working Voltage=120VAC, Compliance=Leadfree/RoHS, Datasheet URL=https://katalog.we-online.de/em/datasheet/615008137421.pdf, Entrance=Horizontal, Manufacturer URL=http://www.we-online.de, Mounting Technology=THT, Packaging=Tray, Part Number=615008137421, Pin Number=8P8C, Port=1x1, Publisher=WurthElektronik
P1 P2 P3 P4 P5: library part "Header 4", "Header, 4-Pin", LatestRevisionDate=17-Jul-2002, LatestRevisionNote="Re-released for DXP Platform.", Publisher="Altium Limited"
P6: library part "Header 6", "Header, 6-Pin", LatestRevisionDate=17-Jul-2002, LatestRevisionNote="Re-released for DXP Platform.", Publisher="Altium Limited"
R1 R2 R3 R4 R5 R6 R7 R8 R9 R10 R11 R12 R13 R14 R15 R16 R17 R18 R19 R20 R21 R22 R23 R24 R25 R26 R27 R28 R29 R30 R31 R32 R33 R34: "Resistor", LatestRevisionDate=29-May-2009, LatestRevisionNote="IPC-7351 Footprint Added.", PackageDescription="Chip Resistor", PackageReference=J1-0603, Published=8-Jun-2000, Publisher="Altium Limited"
R35_C1 R35_C2 R35_C3: library part Res3, "Resistor", LatestRevisionDate=29-May-2009, LatestRevisionNote="IPC-7351 Footprint Added.", PackageDescription="Chip Resistor", PackageReference=J1-0603, Published=8-Jun-2000, Publisher="Altium Limited"
U1: library part CMP-12105-000074-1, "IC MCU 32BIT 2MB FLASH 144LQFP", Ambient Temperature Range High=+85°C, Ambient Temperature Range Low=-40°C, Frequency=216MHz, Manufacturer=STMicroelectronics, Max Junction Temp=+105°C, Max Supply Voltage=3.6V, Min Supply Voltage=1.7V, Package=LQFP144-1A, Temperature="-40°C to +85°C", Automotive=No, Category=IC, ComponentLink2Description=Datasheet, ComponentLink2URL=https://www.st.com/resource/en/datasheet/stm32f767zi.pdf, Core Architecture="ARM Cortex-M7", Data Bus Width=32bits, Device Class L1="Integrated Circuits (ICs)", Device Class L2="Embedded Processors and Controllers", Device Class L3=Microcontrollers, Digikey Description="IC MCU 32BIT 2MB FLASH 144LQFP", Height=1.6mm, Interface=I2C,SPI,UART,USART,EBI/EMI,CAN,USB,LIN,IrDA,Ethernet,I2S, Ipc Land Pattern Name=QFP50P2200X2200X160-144, Lead Free=Yes, Manufacturer Part Number=STM32F767ZIT6, Memory Size=2048KBytes, Memory Type=FLASH, Mouser Description="ARM Microcontrollers - MCU High-performance and DSP with FPU, ARM Cortex-M7 MCU with 2 Mbytes Flash, 216 MHz CPU, Art Accelerator, L1 cache, SDRAM,", Number Of A/D Converters=3, Number Of Adc Channels=24, Number Of Cores=1, Number Of Ethernet Channels=1, Number Of I2C Channels=4, Number Of I/Os=114, Number Of Pwm Channels=4, Number Of Spi Channels=6, Number Of Timers/Counters=15, Number Of Uart Channels=4, Number Of Usb Channels=1, Octopart=https://octopart.com/stm32f767zit6-stmicroelectronics-70527068, Ram Size=512KBytes, RoHS=TRUE, Standoff Height=0.05mm, Temperature Range High=+85°C, Temperature Range Low=-40°C
U2_C1 U2_C2 U2_C3: library part CMP-0315-00075-2, "SN65HVD232Q 3.3-V CAN TRANSCEIVER. Based on footprint for SN65HVD23x which are all the same", Drivers Per Package=1, Manufacturer="Texas Instruments", PartNumber=SN65HVD232DR, Rating=Catalog, Supply Voltage(s)(V)=3.3, Code_JEDEC=MS-012AA, ComponentLink1Description=Datasheet, ComponentLink1URL=http://www.ti.com/general/docs/lit/getliterature.tsp?genericPartNumber=SN65HVD232&fileType=pdf, DatasheetVersion=SLOS346K, Eco-Plan="Green (RoHS & no Sb/Br)", ICC(Max)(mA)=17, Isolated=No, Mounting Technology="Surface Mount", PackageDescription="8-Pin Plastic Small Outline Integrated Circuit, 4.9 x 3.9 mm, Pitch 1.27 mm Pitch", PackageReference=D0008A, PackageVersion="revM, Jun-2011", Receivers Per Package=1, SubFamily=CAN, Transient Pulse Protection(V)="-25 to 25"
U3: library part CMP-2000-05426-1, "DC/DC Converter, TSR-1 Series, 3.3 VDC, 1 A, -40 to 85 degC, 3-Pin THD (SIP), RoHS", Input Voltage DC Max=36V, Input Voltage DC Min=4.75V, Manufacturer=Tracopower, Output Current Max=1A, Output Power Max=3.3W, Output Voltage Nom.=3.3V, Package Description="3-Pin Single In-line Package, Body 11.7 x 7.6 mm, Pitch 2.54 mm", Package Reference=SIP-3, Approvals & Standards=-, Datasheet URL=https://datasheet.ciiva.com/6815/tsr1-6815641.pdf, Datasheet Version=Jan-15, DC / DC Converter Mounting=ThroughHole, DC / DC Converter Output Type=Fixed, DC / DC Converter Type=SIP, Depth=11.5mm, Height=10.2mm, Manufacturer URL=http://www.tracopower.com/home, No. of Outputs=1Output, Product Range=TSR-1Series, SVHC=NoSVHC(17-Dec-2015), Width=7.6mm
U4: library part CMP-06281-000006-2, "IC TRANSCEIVER 1/1 24SQFN", Ambient Temperature Range High=+70°C, Ambient Temperature Range Low=0°C, Manufacturer=Microchip, Max Supply Voltage=3.6V, Min Supply Voltage=1.14V, Nominal Supply Current=6.5-59mA, Package=C04-143B-S4QFN, Temperature="0°C to +70°C", Automotive=No, Category=IC, ComponentLink2Description=Datasheet, ComponentLink2URL=http://ww1.microchip.com/downloads/en/DeviceDoc/DS_LAN8742_00001989A.pdf, Data Rate=100Mbits/s, Device Class L1="Integrated Circuits (ICs)", Device Class L2="Interface ICs", Device Class L3="Ethernet Interface ICs", Digikey Description="IC TRANSCEIVER 1/1 24SQFN", Height=1mm, Interface=Ethernet,Other, Ipc Land Pattern Name=QFN50P400X400X90-24, Lead Free=Yes, Manufacturer Part Number=LAN8742A-CZ-TR, Mouser Description="Small Footprint RMII 10/100 Ethernet Transceiver with flexPWR Technology", Number Of Channels=1, Octopart=https://octopart.com/lan8742a-cz-tr-microchip-29030587, RoHS=TRUE, Simplex Duplex=Full-Duplex, Standoff Height=0mm, Temperature Range High=+70°C, Temperature Range Low=0°C
U5: library part CMP-2000-05322-1, "10/100 Base-T Single Port Surface Mount Magnetic with Turns Ratio, -40 to 85 degC, 16-Pin Module, RoHS, Tube", Frequency Range=100kHzto100MHz, Isolation Voltage=1.5kV, Manufacturer=Pulse, Operating Temperature Range=0Cto+70C, Package Description="16-Pin Surface Mount Device, Body 12.7 x 7.11 mm, Pitch 1.27 mm", Package Reference=MODULE-16, Application=100Base-TX, Brand=Pulse, Datasheet URL=http://www.mouser.com/ds/2/336/H325-32121.pdf, Datasheet Version="Rev. H325.Q, 09/2009", Height=6.09mm, Length=12.7mm, Manufacturer URL=http://www.pulseelectronics.com/, Number Of Channels=Single, Packaging=Tube, Product=LAN, Product Category=Audio&SignalTransformers, Qualification=Commercial, RoHS=True, Shielding=Unshielded, Termination Style=SMD/SMT, Type=Module, Unit Weight=0.098767oz, Width=9.53m
U6: library part CMP-2000-07137-1, "Electronic Protection Array for ESD and Overvoltage Protection, 3 pF, -40 to 105 degC, 16-Pin SOIC, RoHS, Tube", Manufacturer=Littelfuse, Package / Case="16-SOIC(0.154\",3.90mmWidth)", Package Description="16-Pin Small Outline Integrated Circuit, Body 9.9 x 3.9 mm, Pitch 1.27 mm", Package Reference=SOIC-16, Power (Watts)=-, Standard Package=1,920, Supplier Device Package=16-SOIC, Voltage - Working=30V, Applications=GeneralPurpose, Catalog Drawings=SP72SeriesCircuit, Category=CircuitProtection, Datasheet URL=https://datasheet.ciiva.com/1219/sp720-leadfree-1219859.pdf, Datasheet Version=01/2006, Family=TVS-MixedTechnology, Manufacturer URL=http://www.littelfuse.com/, Mounting Technology=SurfaceMount, Number of Circuits=14, Online Catalog=SPA™SP72xSeries, Other Names=F2717, Packaging=Tube, Product Training Modules=TVSDiodeArrays-ESDSuppressorsforI/OInterfaces, Series=-, Technology=MixedTechnology, Voltage - Clamping=-
X1: library part CMP-40224-000026-1, "CRYSTAL 25.0000MHZ 18PF SMD", Case/Package=SMD/SMT, ESR (Equivalent Series Resistance)=40R, Frequency=25MHz, Frequency Stability=30ppm, Frequency Tolerance=20ppm, Load Capacitance=18pF, Max Operating Temperature=85°C, Min Operating Temperature=-40°C, Height=0.043inch, Length=0.236inch, Mount="Surface Mount", Packaging="Cut Tape", Width=0.138inch

## Via types
v1: diameter 50, hole 28, Top Layer to Bottom Layer, 143 vias
v2: diameter 23.62, hole 11.81, Top Layer to Bottom Layer, 9 vias

## Nets (pads, with @x,y where several pads share a name; then routed paths per layer and width w, separated by ;. In a path a pad name is that pad's centre, name@x,y a point inside that pad or via, vN(x,y) a via of type N, cw(c..) or ccw(c..) an arc to the next point about the centre after c; other vN are vias at no path point)
3.3V: C1.1 C2.1 C3.1 C4.1 C5.1 C6.1 C7.1 C8.1 C9.1 C10.1 C11.1 C12.1 C13.1 C16_C1.1 C16_C2.1 C16_C3.1 C19.1 C30.1 C36.1 C37.1 D2.2 FB1.1 J2.4 P6.1 R9.2 R10.2 R11.2 R12.2 R13.2 R16.1 R17.1 R18.1 R22.1 R23.1 R32.1 U1.17 U1.30 U1.32 U1.33 U1.39 U1.52 U1.62 U1.72 U1.84 U1.95 U1.108 U1.121 U1.131 U1.143 U1.144 U2_C1.3 U2_C2.3 U2_C3.3 U3.3 U4.9 U6.15 U6.16 | length 7261
  Top Layer w5: C1.1@2706.38,1705 2706.85,1704.53 U1.17@2818.07,1704.53 2860.79,1704.53 v1(2885,1680.32) ; C11.1@2708.62,1365 2745.68,1365 2770.25,1389.57 U1.33@2818.07,1389.57 ; C2.1@2708.62,1450 2785.24,1450 2786.32,1448.92 2817.78,1448.92 U1.30@2818.07,1448.62 2853.62,1448.62 2875,1470 2930,1470 2955,1445 v1(2955,1385) ; U1.32@2818.07,1409.25 U1.33@2818.07,1389.57 ; U1.144@2891.38,2093.82 U1.144@2891.89,2093.31 2890,2091.42 2890,2031.36 v1@2891.89,2029.47 ; C3.1@2905,1145 2931.38,1171.38 2931.38,1361.38 v1(2955,1385) ; U1.143@2911.57,2093.31 2911.57,2049.16 v1@2891.89,2029.47 ; C9.1@3151.38,2205 3147.8,2201.42 U1.131@3147.8,2093.31 3147.8,2061.27 3068.01,1981.48 2933.52,1981.48 v1(2890,2025) 2891.89,2026.89 v1@2891.89,2029.47 ; C4.1@3186.38,1145 3187.17,1145.79 U1.52@3187.17,1256.69 3187.17,1297.17 3215,1325 v1(3255,1325) ; v1(3320,2025) 3344.65,2049.65 U1.121@3344.65,2093.31 3344.65,2161.73 C13.1@3340,2166.38 ; C5.1@3384.02,1150.98 U1.62@3384.02,1256.69 3384.02,1339.02 v1(3500,1455) ; v1(3580,2025) 3615.48,2025 3615.86,2024.63 3649.55,2024.63 U1.108@3654.69,2019.49 3674.37,2019.49 3724.88,2070 C8.1@3766.38,2070 ; C6.1@3640,1150 3637.05,1150 3580.87,1206.18 U1.72@3580.87,1256.69 3580.87,1294.13 3500,1375 v1(3500,1455) ; C12.1@3765,1700 3759.31,1705.69 3745.67,1705.69 3687.77,1763.58 U1.95@3654.69,1763.58 3581.61,1763.58 3506.12,1688.09 v1@3506.12,1461.12 ; C7.1@3766.38,1545 3764.33,1547.05 U1.84@3654.69,1547.05 3592.05,1547.05 v1@3506.12,1461.12 ; U1.33@2818.07,1389.57 2950.43,1389.57 v1(2955,1385) ; v1(3500,1455) v1@3506.12,1461.12
  Top Layer w7: v1@3009.53,656.11 v1(3009.53,648.42) 3009.53,645.33 3029.37,625.48 U4.9@3029.37,565.19
  Top Layer w10: J2.4@1303.07,1764.88 1323.74,1764.88 1333.86,1775 1485.53,1775 1510.53,1750 1572.5,1750 v1@1573.75,1751.25 ; C19.1@1465,95 U3.3@1465,225 1465,229.06 D2.2@1660,424.06 ; R9.2@1510,1820 1513.94,1820 1541.89,1792.04 1541.89,1783.11 v1@1573.75,1751.25 ; R10.2@1540,1675 1540,1715 v1@1570.26,1745.26 ; v1(1575,1752.5) v1@1573.75,1751.25 ; R13.2@1580,1820 1576.06,1816.06 1576.06,1751.06 1585,1760 1585,1758.67 1591.17,1752.5 1622.5,1752.5 1630,1760 1685,1760 C37.1@1690,1755 C36.1@1690,1675 ; v1@1586.06,1760 1646.06,1820 R12.2@1650,1820 ; R11.2@1600,1675 1600,1715.53 1575,1740.53 1575,1750 v1@1573.75,1751.25 ; U6.15@2290,983.31 2290,936.57 v1@2315,911.57 ; U2_C1.3@2309.72,2221.34 2310.41,2220.65 2396.59,2220.65 C16_C1.1@2397.28,2219.96 2399.09,2218.15 2484.25,2218.15 v1(2486.06,2216.34) 2496.89,2216.34 2508.23,2205 C10.1@2891.38,2205 ; U2_C3.3@2310,1550 2310.69,1549.31 2398.78,1549.31 2403.78,1544.31 2470.69,1544.31 v1(2475,1540) ; U2_C2.3@2315,1885 2398.78,1885 C16_C2.1@2401.28,1882.5 2405.03,1878.75 2471.25,1878.75 v1(2475,1875) ; U6.16@2340,983.31 2340,936.57 v1@2315,911.57 ; v1(2588.27,219.06) 2599.1,219.06 2608.46,228.42 FB1.1@2671.3,228.42 ; R32.1@2610.94,1590 2610.94,1593.94 2696.61,1679.61 2696.61,1695.24 C1.1@2706.38,1705 ; R23.1@2745.48,568.42 R22.1@2745.48,624.48 ; R22.1@2745.48,628.42 2745.48,632.36 2669.53,708.3 v1(2669.53,713.42) 2723.07,766.97 R16.1@2803.27,766.97 ; C30.1@2988.27,713.34 2988.27,677.37 v1@3009.53,656.11 ; R18.1@3113.27,766.49 3113.27,838.73 3142.96,868.42 3194.53,868.42 v1(3234.53,828.42) 3234.53,768.22 R17.1@3233.27,766.97 ; v1@2315,911.57 v1(2315,905) v1@2315,911.57
12V: CR1.1 D1.2 D8.2 J1.1 P1.1 P2.1 P3.1 U6.9 | length 2481.6
  Top Layer w10: D8.2@880,450 954.07,450 1014.07,510 D1.2@1380.94,510
  Top Layer w15: J1.1@611.22,265 760,265 795,300 CR1.1@910,300 880,330 D8.2@880,450 900.06,470.06 900.06,515.06 925,540 v1(980,540) ; P1.1@1115,735 P2.1@1245,735 ; P3.1@1375,735 1383.24,726.76 1418.24,726.76 1465,680 1697.16,680 1990,972.84 U6.9@1990,983.31
  Bottom Layer w15: v1(980,540) 989.47,540 1041.93,592.46 1041.93,713.96 1062.97,735 P1.1@1115,735 ; P2.1@1245,735 P3.1@1375,735
C1_N: P1.3 R35_C1.1 U2_C1.6 | length 1939.2
  Top Layer w10: P1.3@1115,935 1123.83,926.17 1123.83,900.86 1129.69,895 1137.97,895 1170,927.03 1170,1073.28 1481.23,1384.52 1631.23,1384.52 1825,1578.28 1825,2074.58 1958.78,2208.37 1981.21,2208.37 1987.07,2214.22 1987.07,2219.11 1995.85,2227.89 R35_C1.1@1999.78,2227.89 ; R35_C1.1@1997.28,2225.39 1999.31,2223.37 2085.26,2223.37 U2_C1.6@2087.28,2221.34
C1_P: P1.2 R35_C1.2 U2_C1.7 | length 1936.1
  Top Layer w10: P1.2@1115,835 1123.83,843.83 1123.83,869.14 1129.69,875 1146.26,875 1190,918.74 1190,1065 1489.52,1364.52 1639.52,1364.52 1845,1570 1845,2066.3 1967.07,2188.37 1981.21,2188.37 1987.07,2182.51 1987.07,2177.62 1995.85,2168.84 R35_C1.2@1999.78,2168.84 2084.78,2168.84 U2_C1.7@2087.28,2171.34
C2_N: P2.3 R35_C2.1 U2_C2.6 | length 1500.3
  Top Layer w10: P2.3@1245,935 1253.83,926.17 1253.83,900.86 1259.69,895 1267.97,895 1300,927.03 1300,1057.8 1572.2,1330 1636.72,1330 1868.03,1561.32 1868.03,1783.56 1959,1874.53 1981.43,1874.53 1987.28,1880.39 1987.28,1885.28 1996.06,1894.06 R35_C2.1@2000,1894.06 2004.06,1890 U2_C2.6@2088.78,1890
C2_P: P2.2 R35_C2.2 U2_C2.7 | length 1500.7
  Top Layer w10: P2.2@1245,835 1253.83,843.83 1253.83,869.14 1259.69,875 1276.26,875 1320,918.74 1320,1049.52 1580.48,1310 1645,1310 1888.03,1553.03 1888.03,1775.28 1967.28,1854.53 1981.43,1854.53 1987.28,1848.67 1987.28,1843.78 1996.06,1835 R35_C2.2@2000,1835 ; R35_C2.2@2003.78,1825.94 2017.83,1840 U2_C2.7@2088.78,1840
C3_N: P3.3 R35_C3.1 U2_C3.6 | length 1100.8
  Top Layer w10: P3.3@1375,935 1383.83,926.17 1383.83,900.86 1389.69,895 1397.97,895 1430,927.03 1430,1065 1900,1535 1983.98,1535 1989.84,1540.86 1989.84,1545.75 1998.62,1554.53 R35_C3.1@2002.56,1554.53 ; R35_C3.1@2002.56,1550 U2_C3.6@2087.56,1550
C3_P: P3.2 R35_C3.2 U2_C3.7 | length 1104.6
  Top Layer w10: P3.2@1375,835 1383.83,843.83 1383.83,869.14 1389.69,875 1406.26,875 1450,918.74 1450,1056.72 1908.28,1515 1983.98,1515 1989.84,1509.14 1989.84,1504.25 1998.62,1495.47 R35_C3.2@2002.56,1495.47 ; R35_C3.2@2002.56,1490.94 2011.34,1499.72 2020.86,1499.72 2021.13,1500 U2_C3.7@2087.56,1500